# Altium PCB MBR.PcbDoc
Units mm, origin at the board's own origin, x right, y up, seen from the top; angles counter-clockwise.
Board outline 180 x 125 mm, 2 copper layers (Top Layer, Bottom Layer), stack 1.576 mm thick; 66 components, 60 nets, 276 pads, 0 vias.
Unrouted connection lines stored in the file: 180.
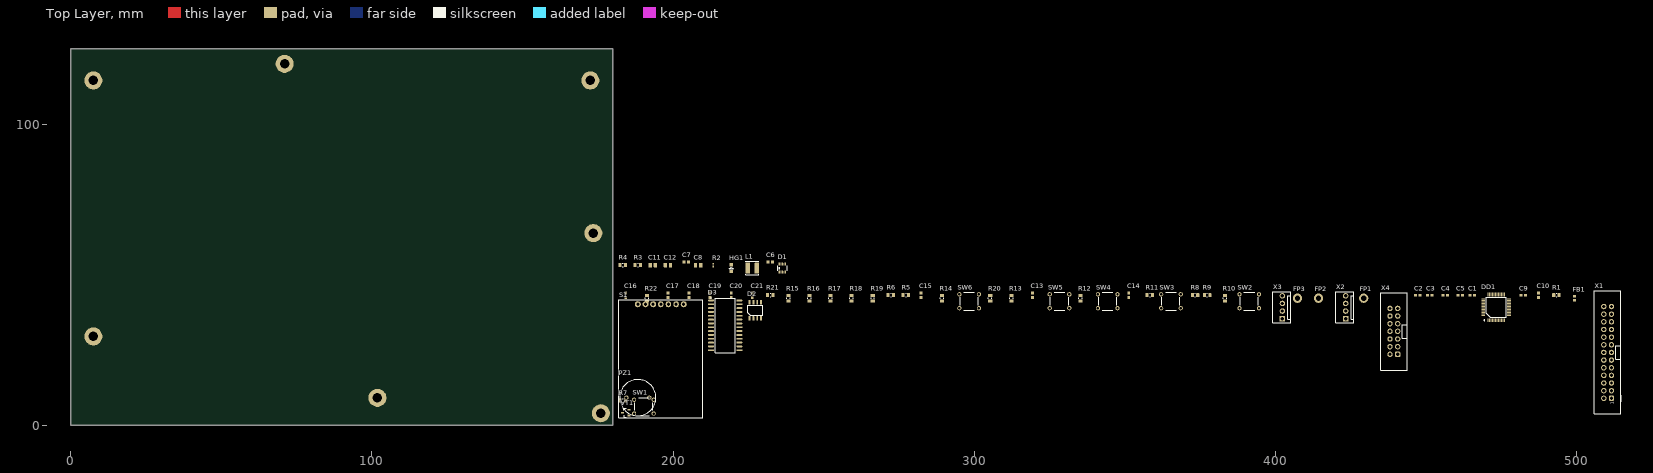
[diagram p0: Top Layer view]
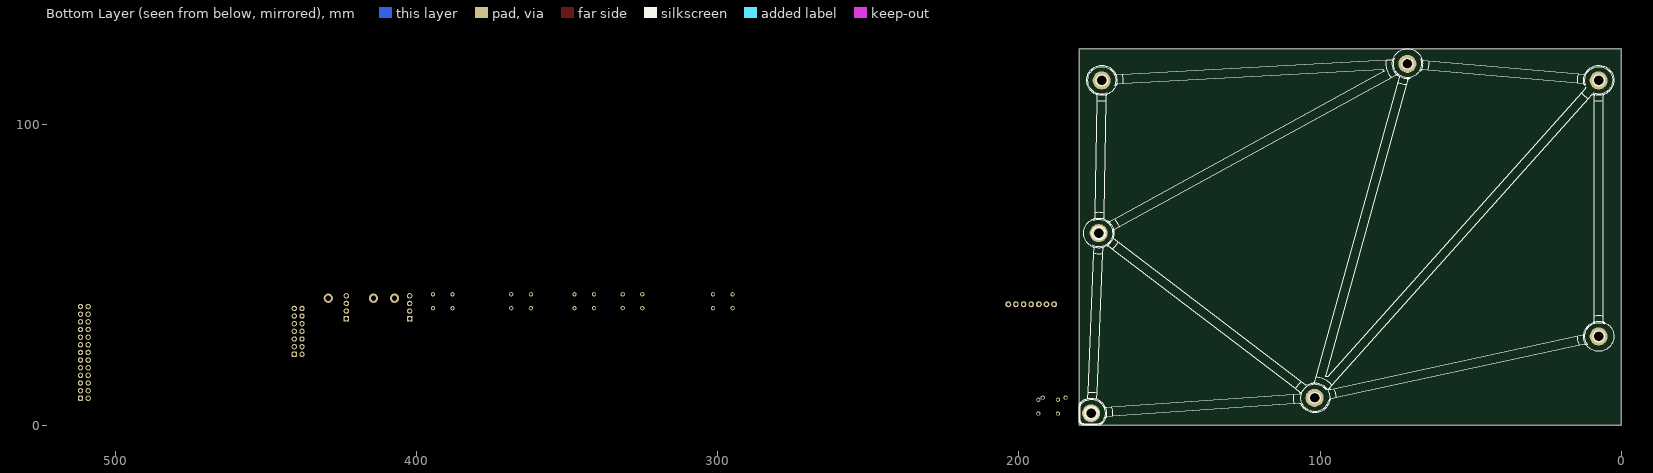
[diagram p1: Bottom Layer view, seen from below]

## Layer stack, top to bottom
Top Solder: solder mask 0.012, Solder Resist, Dk 3.5
Top Layer: signal copper 0.038
Dielectric 1: dielectric 1.5, FR-4, Dk 4.8
Bottom Layer: signal copper 0.038
Bottom Solder: solder mask 0.012, Solder Resist, Dk 3.5

## Board outline
0,0 180,0 180,125 0,125

## Design rules (kind name [scope] priority, off if disabled: settings)
BoardOutlineClearance [All] p1: gap=0.5 ignorepadtopadclearanceinfootprint=FALSE
Clearance MiddleVoltage [InNetClass('MiddleVoltage')] p1: gap=0.5 ignorepadtopadclearanceinfootprint=FALSE except(0: Arc-Hole Track-Hole SMDPad-Hole THPad-Hole Via-Hole Fill-Hole Poly-Hole Region-Hole Text-Hole; 0.2: Arc-Text Track-Text SMDPad-Text THPad-Text Via-Text Fill-Text Poly-Text Region-Text Text-Text)
Clearance HighVoltage [InNetClass('HighVoltage')] p2: gap=1 ignorepadtopadclearanceinfootprint=FALSE except(0: Arc-Hole Track-Hole SMDPad-Hole THPad-Hole Via-Hole Fill-Hole Poly-Hole Region-Hole Text-Hole; 0.2: Arc-Text Track-Text SMDPad-Text THPad-Text Via-Text Fill-Text Poly-Text Region-Text Text-Text)
Clearance Standart [All] p3: gap=0.2 ignorepadtopadclearanceinfootprint=FALSE except(0: Arc-Hole Track-Hole SMDPad-Hole THPad-Hole Via-Hole Fill-Hole Poly-Hole Region-Hole Text-Hole)
ComponentClearance [All] p1: gap=0.1 collisioncheckmode=3 verticalgap=0.1 showdistances=TRUE
Height [All] p1: minheight=0 maxheight=40 prefheight=12.7
HoleSize [All] p1: absolutevalues=TRUE maxlimit=12 minlimit=0.3 maxpercent=80.000 minpercent=20.000
HoleToHoleClearance [All] p1: gap=0.3 allowstackedmicrovias=TRUE
MinimumSolderMaskSliver [All] p1: minsoldermaskwidth=0.1
NetAntennae [All] p1: netantennaetolerance=2
PlaneClearance [All] p1: clearance=0.3
PlaneConnect PlaneConnectMiddleCurrent [InNetClass('MiddleCurrent')] p1: planeconnectstyle=Relief reliefexpansion=0.508 reliefentries=4 reliefconductorwidth=0.5 reliefairgap=0.3
PlaneConnect PlaneHighCurrent [InNetClass('HighCurrent')] p2: planeconnectstyle=Relief reliefexpansion=0.508 reliefentries=4 reliefconductorwidth=0.5 reliefairgap=0.35
PlaneConnect [All] p3: planeconnectstyle=Relief reliefexpansion=0.508 reliefentries=4 reliefconductorwidth=0.3 reliefairgap=0.3
PolygonConnect PolygonConnectMiddleCurrent [All vs InNetClass('MiddleCurrent')] p1: connectstyle=Relief reliefconductorwidth=0.4 reliefentries=4 polygonreliefangle="90 Angle" airgapwidth=0.3
PolygonConnect PolygonHighCurrent [InNetClass('HighCurrent')] p2: connectstyle=Relief reliefconductorwidth=0.5 reliefentries=4 polygonreliefangle="90 Angle" airgapwidth=0.3
PolygonConnect PolygonConnect_Keepout [(ObjectKind = 'Track') And (Layer = 'KeepOutLayer')] p3: connectstyle=Direct reliefconductorwidth=0.254 reliefentries=4 polygonreliefangle="90 Angle" airgapwidth=0.254
PolygonConnect PolygonConnect_Via [IsVia] p4: connectstyle=Direct reliefconductorwidth=0.254 reliefentries=4 polygonreliefangle="90 Angle" airgapwidth=0.254
PolygonConnect [All] p5: thpad.connectstyle=Relief thpad.reliefconductorwidth=0.3 thpad.reliefentries=4 thpad.polygonreliefangle="90 Angle" thpad.airgapwidth=0.25 smdpad.connectstyle=Relief smdpad.reliefconductorwidth=0.3 smdpad.reliefentries=4 smdpad.polygonreliefangle="90 Angle" smdpad.airgapwidth=0.25 via.connectstyle=Direct via.reliefconductorwidth=0.3 via.reliefentries=4 via.polygonreliefangle="90 Angle" via.airgapwidth=0.3
RoutingCorners [All] p1: cornerstyle=45-Degree minsetback=1 maxsetback=3
RoutingVias Power [InNetClass('Power')] p1: holewidth=0.8 width=1.5 viastyle="Through Hole" minholewidth=0.5 minwidth=1 maxholewidth=1.2 maxwidth=3
RoutingVias [All] p2: holewidth=0.4 width=0.8 viastyle="Through Hole" minholewidth=0.3 minwidth=0.6 maxholewidth=0.5 maxwidth=1
SilkToSilkClearance [All] p1: silktosilkclearance=0
SilkToSolderMaskClearance [IsPad] p1: minsilkscreentomaskgap=0.05 clearancetoexposedcopper=TRUE
SolderMaskExpansion SolderMaskExpansion_VIA [IsVia] p1: expansion=-3 istentingtop=TRUE useseparateexpansions=TRUE expansionbottom=-3 istentingbottom=TRUE
SolderMaskExpansion [All] p2: expansion=0.05 istentingtop=FALSE
SupplyNets "Schematic Supply Nets_3" [InNet('+VBAT')] p1: voltage=0.000
SupplyNets "Schematic Supply Nets_2" [InNet('GND')] p2: voltage=0.000
SupplyNets "Schematic Supply Nets_1" [InNet('AVDD')] p3: voltage=0.000
SupplyNets "Schematic Supply Nets" [InNet('3V3')] p4: voltage=0.000
Width Width_ANT [InNetClass('Anthenna')] p1: maxlimit=1.641 minlimit=0.2 preferedwidth=1.641
Width WidthMiddleCurrent [InNetClass('MiddleCurrent')] p2: maxlimit=2 minlimit=0.35 preferedwidth=0.5
Width WidthHighCurrent [InNetClass('HighCurrent')] p3: maxlimit=5 minlimit=0.5 preferedwidth=1
Width [All] p4: maxlimit=0.5 minlimit=0.2 preferedwidth=0.25
19 further rules are at their usual default settings.

## Classes and differential pairs
component class STEP_DOWN: C6 C7 C8 C11 C12 D1 HG1 L1 R2 R3 R4
component class MBR: C1 C2 C3 C4 C5 C9 C10 C13 C14 C15 C16 C17 C18 C19 C20 C21 D2 D3 DD1 FB1 FP1 FP2 FP3 PZ1 R1 R5 R6 R7 R8 R9 R10 R11 R12 R13 R14 R15 R16 R17 R18 R19 R20 R21 R22 S1 SW1 SW2 SW3 SW4 SW5 SW6 VT1 X1 X2 X3 X4

## Components (designator, comment, footprint, x,y, rotation, side; value= is the part's Value field where it differs from the comment)
C1 "0.1uF" C_CERAMIC_0603_MED 465.273,43.181 r0 top
C2 "0.1uF" C_CERAMIC_0603_MED 447.273,43.181 r0 top
C3 "0.1uF" C_CERAMIC_0603_MED 451.273,43.181 r0 top
C4 "0.1uF" C_CERAMIC_0603_MED 456.273,43.181 r0 top
C5 "10uF" C_CERAMIC_0603_MED 461.273,43.181 r0 top
C6 "0.1uF" C_CERAMIC_0603_MED 232.273,54.181 r0 top
C7 "0.1uF" C_CERAMIC_0603_MED 204.273,54.181 r0 top
C8 "22uF" CAP-0805(2012)X125T20 208.273,53.181 r0 top
C9 "0.1uF" C_CERAMIC_0603_MED 482.273,43.181 r0 top
C10 "1uF" C_CERAMIC_0603_MED 487.273,43.181 r90 top
C11 "22uF" CAP-0805(2012)X125T20 193.273,53.181 r0 top
C12 "22uF" CAP-0805(2012)X125T20 198.273,53.181 r0 top
C13 "0.1uF" C_CERAMIC_0603_MED 319.273,43.181 r90 top
C14 "0.1uF" C_CERAMIC_0603_MED 351.273,43.181 r90 top
C15 "0.1uF" C_CERAMIC_0603_MED 282.273,43.181 r90 top
C16 "0.1uF" C_CERAMIC_0603_MED 184.273,43.181 r90 top
C17 "0.1uF" C_CERAMIC_0603_MED 198.273,43.181 r90 top
C18 "0.1uF" C_CERAMIC_0603_MED 205.273,43.181 r90 top
C19 "0.1uF" C_CERAMIC_0603_MED 212.273,43.181 r90 top
C20 "0.1uF" C_CERAMIC_0603_MED 219.273,43.181 r90 top
C21 "0.1uF" C_CERAMIC_0603_MED 226.273,43.181 r90 top
D1 "AP62300WU-7" SOT-23-6 236.273,52.181 r0 top
D2 "24LC128-E/SN" SOIC-8_W3.9MM 227.273,38.181 r0 top
D3 "MCP23017T-E/SO" SOIC-28N_N 217.273,33.181 r0 top
DD1 "STM32F103CBT6" LQFP-48 473.273,39.181 r0 top
FB1 "BLM18KG601BH1D" BLM18KGxxxBH1x_MED 499.273,42.181 r90 top value="600 Ohms @ 100MHz"
FP1 "PAD-1.75mm" PAD-1.75mm 429.273,42.181 r0 top
FP2 "PAD-1.75mm" PAD-1.75mm 414.273,42.181 r0 top
FP3 "PAD-1.75mm" PAD-1.75mm 407.273,42.181 r0 top
HG1 "LTST-C171GKT" LTST-C171GKT 219.273,52.181 r90 top
L1 "4.7uH" SRN4018-Series_1.8mm 226.273,52.181 r0 top
PZ1 "WST-1203UX" WST-1203UX 188.273,9.181 r0 top
R1 "10k" R_ANY_CHIP_0805_MED 493.273,43.181 r0 top
R2 "31.6k" R_ANY_CHIP_0402_MED 213.273,53.181 r90 top
R3 "10k" R_ANY_CHIP_0805_MED 188.273,53.181 r0 top
R4 "510" R_ANY_CHIP_0805_MED 183.273,53.181 r0 top
R5 "10k" R_ANY_CHIP_0805_MED 277.273,43.181 r0 top
R6 "10k" R_ANY_CHIP_0805_MED 272.273,43.181 r0 top
R7 "10k" R_ANY_CHIP_0805_MED 183.273,8.181 r0 top
R8 "10k" R_ANY_CHIP_0805_MED 373.273,43.181 r0 top
R9 "10k" R_ANY_CHIP_0805_MED 377.273,43.181 r0 top
R10 "10k" R_ANY_CHIP_0805_MED 383.273,42.181 r90 top
R11 "10k" R_ANY_CHIP_0805_MED 358.273,43.181 r0 top
R12 "10k" R_ANY_CHIP_0805_MED 335.273,42.181 r90 top
R13 "10k" R_ANY_CHIP_0805_MED 312.273,42.181 r90 top
R14 "10k" R_ANY_CHIP_0805_MED 289.273,42.181 r90 top
R15 "10k" R_ANY_CHIP_0805_MED 238.273,42.181 r90 top
R16 "10k" R_ANY_CHIP_0805_MED 245.273,42.181 r90 top
R17 "10k" R_ANY_CHIP_0805_MED 252.273,42.181 r90 top
R18 "10k" R_ANY_CHIP_0805_MED 259.273,42.181 r90 top
R19 "10k" R_ANY_CHIP_0805_MED 266.273,42.181 r90 top
R20 "220" R_ANY_CHIP_0805_MED 305.273,42.181 r90 top
R21 "220" R_ANY_CHIP_0805_MED 232.273,43.181 r0 top
R22 "10k" R_ANY_CHIP_0805_MED 191.273,42.181 r90 top
S1 "1.3-LCD-Shield" 1.3-TFT-LCD-SHIELD 188.273,40.181 r0 top
SW1 "FSM4JH" 1825910-6 190.273,6.181 r0 top
SW2 "FSM4JH" 1825910-6 391.273,41.181 r0 top
SW3 "FSM4JH" 1825910-6 365.273,41.181 r0 top
SW4 "FSM4JH" 1825910-6 344.273,41.181 r0 top
SW5 "FSM4JH" 1825910-6 328.273,41.181 r0 top
SW6 "FSM4JH" 1825910-6 298.273,41.181 r0 top
VT1 "IRLML6244" SOT-23_MED 184.273,4.181 r0 top
X1 "DS1013-26SSIB1-3A" BH-26 510.273,24.181 r90 top
X2 "WH-04S" WF-4S 423.273,39.181 r90 top
X3 "WH-04S" WF-4S 402.273,39.181 r90 top
X4 "DS1013-14SSIB1-3A" BH-14 439.273,31.181 r90 top

## Footprints (in the part's own frame and the unit in brackets; to place one, negate y for a bottom-side part, rotate by r counter-clockwise, add the part's x,y. Pads: shape width x height; smd on the part's side, far side on the other; paste and mask are expansions set on the pad)
1.3-TFT-LCD-SHIELD [mm]
  round 2 hole 1: 1(0,0) 2(2.54,0) 3(5.08,0) 7(15.24,0)
  oval 1.8x2 hole 1: 4(7.62,0) 5(10.16,0) 6(12.7,0)
  silkscreen extent -6.27,-37.75 21.47,1.47, body extent -6.27,-37.75 21.47,1.47, height 6.2
1825910-6 [mm]
  round 1.4 hole 0.8 mask+0.05: 1(3.25,-2.3) 2(-3.25,-2.3) 3(3.25,2.3) 4(-3.25,2.3)
  silkscreen extent -3,-3 3,3, body extent -3.9,-2.99 3.9,3, height 5
BH-14 [mm]
  rrect50% 1.8x1.8 hole 1.1 mask+0.05: 1(-7.62,-1.27)
  round 1.8 hole 1.1 mask+0.05: 2(-7.62,1.27) 3(-5.08,-1.27) 4(-5.08,1.27) 5(-2.54,-1.27) 6(-2.54,1.27) 7(0,-1.27) 8(0,1.27) 9(2.54,-1.27) 10(2.54,1.27) 11(5.08,-1.27) 12(5.08,1.27) 13(7.62,-1.27) 14(7.62,1.27)
  silkscreen extent -12.84,-4.53 12.74,4.37, body extent -12.79,-4.5 12.79,4.4, height 9
BH-26 [mm]
  rrect50% 1.8x1.8 hole 1.1: 1(-15.24,-1.27)
  round 1.8 hole 1.1: 2(-15.24,1.27) 3(-12.7,-1.27) 4(-12.7,1.27) 5(-10.16,-1.27) 6(-10.16,1.27) 7(-7.62,-1.27) 8(-7.62,1.27) 9(-5.08,-1.27) 10(-5.08,1.27) 11(-2.54,-1.27) 12(-2.54,1.27) 13(0,-1.27) 14(0,1.27) 15(2.54,-1.27) 16(2.54,1.27) 17(5.08,-1.27) 18(5.08,1.27) 19(7.62,-1.27) 20(7.62,1.27) 21(10.16,-1.27) 22(10.16,1.27) 23(12.7,-1.27) 24(12.7,1.27) 25(15.24,-1.27) 26(15.24,1.27)
  silkscreen extent -20.41,-4.5 20.41,4.4, body extent -20.44,-4.5 20.38,4.4, height 9
BLM18KGxxxBH1x_MED [mm] "Chip Inductor, 2-Leads, Body 1,60x0,80mm, IPC Medium Density"
  rrect15% 0.87x0.98 smd mask+0.05: 1(-0.665,0) 2(0.665,0)
  body extent -0.87,-0.47 0.88,0.48, height 0.95
C_CERAMIC_0603_MED [mm] "Chip Capacitor, 2-Leads, Body 1,60x0,80mm, IPC Medium Density"
  rrect15% 1x0.95 smd mask+0.05: 1(-0.75,0) 2(0.75,0)
  Top Layer pour cut-out: -0.05,0.45 0.05,0.45 0.05,-0.45 -0.05,-0.45
  body extent -0.9,-0.5 0.9,0.5, height 0.9
CAP-0805(2012)X125T20 [mm] "Chip Capacitor, 2-Leads, Body 2,00x1,25mm, IPC Medium Density"
  rrect15% 1.15x1.45 smd mask+0.05: 1(-0.85,0) 2(0.85,0)
  Top Layer pour cut-out: -0.05,0.651 0.05,0.651 0.05,-0.649 -0.05,-0.649
  body extent -1.1,-0.72 1.1,0.73, height 1.45
LQFP-48 [mm]
  rrect50% 0.3x1.2 smd mask+0.05: 1(-2.75,-4.25) 2(-2.25,-4.25) 3(-1.75,-4.25) 4(-1.25,-4.25) 5(-0.75,-4.25) 6(-0.25,-4.25) 7(0.25,-4.25) 8(0.75,-4.25) 9(1.25,-4.25) 10(1.75,-4.25) 11(2.25,-4.25) 12(2.75,-4.25) 25(2.75,4.25) 26(2.25,4.25) 27(1.75,4.25) 28(1.25,4.25) 29(0.75,4.25) 30(0.25,4.25) 31(-0.25,4.25) 32(-0.75,4.25) 33(-1.25,4.25) 34(-1.75,4.25) 35(-2.25,4.25) 36(-2.75,4.25)
  rrect50% 1.2x0.3 smd mask+0.05: 13(4.25,-2.75) 14(4.25,-2.25) 15(4.25,-1.75) 16(4.25,-1.25) 17(4.25,-0.75) 18(4.25,-0.25) 19(4.25,0.25) 20(4.25,0.75) 21(4.25,1.25) 22(4.25,1.75) 23(4.25,2.25) 24(4.25,2.75) 37(-4.25,2.75) 38(-4.25,2.25) 39(-4.25,1.75) 40(-4.25,1.25) 41(-4.25,0.75) 42(-4.25,0.25) 43(-4.25,-0.25) 44(-4.25,-0.75) 45(-4.25,-1.25) 46(-4.25,-1.75) 47(-4.25,-2.25) 48(-4.25,-2.75)
  silkscreen extent -4.09,-4.44 3.25,3.25, body extent -4.5,-4.5 4.5,4.5, height 1.6
LTST-C171GKT [mm]
  rrect15% 1.1x1.25 smd mask+0.05: AN(-1.1,0) CA(1.1,0)
  silkscreen extent -0.25,-0.6 0.35,0.6, body extent -1.05,-0.67 1.05,0.68, height 0.9
PAD-1.75mm [mm]
  round 3.1 hole 1.75: 1(0,0)
R_ANY_CHIP_0402_MED [mm] "Chip Resistor, 2-Leads, Body 1,00x0,50mm, IPC Medium Density"
  rrect15% 0.6x0.55 smd mask+0.05: 1(-0.425,0) 2(0.425,0)
  body extent -0.52,-0.27 0.53,0.28, height 0.4
R_ANY_CHIP_0805_MED [mm] "Chip Resistor, 2-Leads, Body 2,00x1,25mm, IPC Medium Density"
  rrect15% 1x1.35 smd: 1(-0.9,0) 2(0.9,0)
  silkscreen extent -0.1,-0.58 0.1,0.58, body extent -1,-0.67 1,0.68, height 0.6
SOIC-8_W3.9MM [mm]
  rrect50% 0.6x1.55 smd mask+0.05: 1(-1.905,-2.7) 2(-0.635,-2.7) 3(0.635,-2.7) 4(1.905,-2.7) 5(1.905,2.7) 6(0.635,2.7) 7(-0.635,2.7) 8(-1.905,2.7)
  silkscreen extent -2.5,-1.6 2.5,1.6, body extent -2.45,-3 2.45,3, height 1.7
SOIC-28N_N [mm]
  oval 2x0.6 smd: 1(-4.7,8.255) 2(-4.7,6.985) 3(-4.7,5.715) 4(-4.7,4.445) 5(-4.7,3.175) 6(-4.7,1.905) 7(-4.7,0.635) 8(-4.7,-0.635) 9(-4.7,-1.905) 10(-4.7,-3.175) 11(-4.7,-4.445) 12(-4.7,-5.715) 13(-4.7,-6.985) 14(-4.7,-8.255) 15(4.7,-8.255) 16(4.7,-6.985) 17(4.7,-5.715) 18(4.7,-4.445) 19(4.7,-3.175) 20(4.7,-1.905) 21(4.7,-0.635) 22(4.7,0.635) 23(4.7,1.905) 24(4.7,3.175) 25(4.7,4.445) 26(4.7,5.715) 27(4.7,6.985) 28(4.7,8.255)
  silkscreen extent -4.82,-9.05 3.3,9.23, body extent -5.15,-8.95 5.15,8.95, height 2.65
SOT-23-6 [mm]
  rrect50% 0.6x1 smd mask+0.05: 1(-0.95,-1.33) 2(0,-1.33) 3(0.95,-1.33) 4(0.95,1.33) 5(0,1.33) 6(-0.95,1.33)
  silkscreen extent -1.59,-0.88 1.59,0.85, body extent -1.52,-1.5 1.52,1.5, height 1.25
SOT-23_MED [mm] "SOT23, 3-Leads, Body 2,92x2,37mm, Pitch 0,95mm, IPC Medium Density"
  rrect15% 0.9x0.6 smd mask+0.05: 1(1.1,-0.95) 2(1.1,0.95) 3(-1.1,0)
  silkscreen extent -0.7,-1.5 0.2,1.5, body extent -1.27,-1.5 1.28,1.5, height 1.15
SRN4018-Series_1.8mm [mm] "Semi-shielded Power Inductors, 4.0x4.0x1.8mm"
  rrect15% 1.5x3.6 smd mask+0.05: 1(-1.55,0) 2(1.55,0)
  silkscreen extent -2.2,-2.2 2.2,2.2, body extent -2.1,-2.1 2.1,2.1, height 1.8
WF-4S [mm] "2.54mm 4-pin connector"
  rect 1.8x1.8 hole 1.1: 1(-3.81,0)
  round 1.8 hole 1.1: 2(-1.27,0) 3(1.27,0) 4(3.81,0)
  silkscreen extent -5.13,-2.7 5.13,3.27, body extent -5.08,-2.7 5.08,3.2, height 11.73
WST-1203UX [mm]
  round 1.4 hole 0.8 mask+0.05: 1(-3.8,0) 2(3.8,0)
  silkscreen extent -6,-6 6,6, body extent -6.01,-6 6,6, height 7.5

## Part data
C1 C2 C3 C4 C6 C7 C9 C13 C14 C15 C16 C17 C18 C19 C20 C21: library part CL10B104KB8NNND, "100nF 50V X7R ±10% 0603 Ceramic Capacitor RoHS", Dielectric Type=X7R, Manufacturer="Samsung Electro-Mechanics", Package=0603, Supplier Part Number 1=CL10B104KB8NNND-ND, Temperature Range="-55°C ~ 125°C", Tolerance=±10%, Voltage=50V, Ajax_1C_ID=21313, Ajax_1C_PN="100nF 50V X7R 10% 0603 CL10B104KB8NNND ceramic capacitor SMD", Ajax_1С_Status=Substitution, Component Status=Released, Component Type=SMD, ComponentLink1Description=Datasheet, ComponentLink1URL=https://media.digikey.com/pdf/Data%20Sheets/Samsung%20PDFs/CL_Series_MLCC_ds.pdf, GUID_1C=f1fd6399-ca68-11ea-ab63-0050569f2651, Part Number=CL10B104KB8NNND, Part Type="Ceramic / X7R / 0603", Price=0,0039378, Replacement=CL10B104KB8NNNC, Standard Lead Time="18 Weeks", Supplier 1=Digi-Key
C5: library part CL10A106KP8NNNC, "10uF 10V X5R ±10% 0603 Ceramic Capacitor RoHS", Dielectric Type=X5R, Manufacturer="Samsung Electro-Mechanics", Package=0603, Supplier Part Number 1=1276-1192-2-ND, Temperature Range="-55°C ~ 85°C", Tolerance=±10%, Voltage=10V, Ajax_1C_ID=20452, Ajax_1C_PN="10uF 10V 10% 0603 CL10A106KP8NNNC Ceramic Capacitor SMD RoHS", Ajax_1С_Status=Substitution, Component Status=Released, Component Type=SMD, ComponentLink1Description=Datasheet, ComponentLink1URL=https://media.digikey.com/pdf/Data%20Sheets/Samsung%20PDFs/CL10A106KP8NNNC_Spec.pdf, GUID_1C=10ec15c4-96a3-11ea-ab61-0050569f2651, Part Number=CL10A106KP8NNNC, Part Type="Ceramic / X5R / 0603", Price=0,0106, Replacement=NONE, Standard Lead Time="22 Weeks", Supplier 1=Digi-Key
C8 C11 C12: library part C2012JB1V226M125AC, "22uF 35V JB ±20% 0805 Ceramic Capacitor RoHS", Dielectric Type=JB, Manufacturer="TDK Corporation", Package=0805, Supplier Part Number 1=810-C2012JB1V226M12C, Temperature Range="-25°C ~ 85°C", Tolerance=±20%, Voltage=35V, Ajax_1C_ID=32073, Ajax_1C_PN="22uF 35V 20% 0805 TDK C2012JB1V226M125AC Ceramic Capacitors RoHS", Ajax_1С_Status="RND Only", Component Status=Released, Component Type=SMD, ComponentLink1Description=Datasheet, ComponentLink1URL=https://product.tdk.com/info/en/catalog/datasheets/mlcc_commercial_general_en.pdf, GUID_1C=562d6396-e930-11eb-ab74-0050569f2651, Part Number=C2012JB1V226M125AC, Part Type="Ceramic / JB / 0805", Price=0,567, Replacement=NONE, Standard Lead Time="30 Weeks", Supplier 1=Mouser
C10: library part CL10B105KO8NNNC, "1uF 16V X7R ±10% 0603 Ceramic Capacitor RoHS", Dielectric Type=X7R, Manufacturer="Samsung Electro-Mechanics", Package=0603, Supplier Part Number 1=1276-1019-2-ND, Temperature Range="-55°C ~ 125°C", Tolerance=±10%, Voltage=16V, Ajax_1C_ID=7734, Ajax_1C_PN="1uF 16V X7R 10% 0603 CL10B105KO8NNNC Ceramic Capacitor SMD RoHS", Ajax_1С_Status="Mass Production", Component Status=Released, Component Type=SMD, ComponentLink1Description=Datasheet, ComponentLink1URL=https://media.digikey.com/pdf/Data%20Sheets/Samsung%20PDFs/CL_Series_MLCC_ds.pdf, GUID_1C=0e0d4f9c-d19c-11e5-8143-d8cb8a9acc66, Part Number=CL10B105KO8NNNC, Part Type="Ceramic / X7R / 0603", Price=0,00367919, Replacement=NONE, Standard Lead Time="18 Weeks", Supplier 1=Digi-Key
D1: "4.35V to 18V, 2A, High Efficiency Synchronous Step Down Converter, 500kHz, SOT-23-6", Manufacturer="Diodes Incorporated", Package=SOT-23-6, Temperature Range="-40°C ~ 85°C", Ajax_1С_Status="RND Only", Component Status=Released, Component Type=SMD, ComponentLink1Description=Datasheet, Part Number=AP62300WU-7, Part Type="Power / DC-DC / Buck", Replacement=NONE
D2: "EEPROM Memory IC 128Kb (16K x 8), I2C, 400kHz, 900ns, SOIC-8", Manufacturer="Microchip Technology", Package=SOIC-8, Supplier Part Number 1=579-24LC128-E/SN, Temperature Range="-40°C ~ 125°C", Ajax_1C_ID=10590, Ajax_1C_PN="24LC128-E/SN SO8", Ajax_1С_Status="RND Only", Component Status="On Review", Component Type=SMD, ComponentLink1Description=Datasheet, ComponentLink1URL=http://www.microchip.com/mymicrochip/filehandler.aspx?ddocname=en011851, GUID_1C=19c1e12f-7c36-11e7-813c-14dda9d2d04d, Part Number=24LC128-E/SN, Part Type="Memory / EEPROM", Price=0,83, Replacement=NONE, Standard Lead Time="6 Weeks", Supplier 1=Mouser
D3: "I/O Expander 16 I2C 1.7MHz, SOIC-28", Manufacturer="Microchip Technology", Package=SOIC-28, Supplier Part Number 1=MCP23017T-E/SOTR-ND, Temperature Range="-40°C ~ 125°C", Ajax_1C_ID=14445, Ajax_1C_PN="MCP23017T-E/SO Microchip I/O Expander I2C 28-SOIC", Ajax_1С_Status="RND Only", Component Status="On Review", Component Type=SMD, ComponentLink1Description=Datasheet, ComponentLink1URL=https://ww1.microchip.com/downloads/en/DeviceDoc/20001952C.pdf, GUID_1C=76bcf1a9-fe09-11e8-ab4d-0050569f2651, Part Number=MCP23017T-E/SO, Part Type="Interface / IO Expander", Price=1,2402, Replacement=NONE, Standard Lead Time="12 Weeks", Supplier 1=Digi-Key
DD1: "ARM Cortex-M3 MCU with 128 kB Flash, 72 MHz CPU, USB and CAN, LQFP-48", Manufacturer=STMicroelectronics, Package=LQFP-48, Supplier Part Number 1=511-STM32F103CBT6, Temperature Range="-40°C ~ 85°C", Ajax_1C_ID=53694, Ajax_1C_PN="STM32F103CBT6 IC MCU 32BIT 128KB FLASH 48LQFP ST", Ajax_1С_Status="RND Only", Component Status=Released, Component Type=SMD, ComponentLink1Description=Datasheet, ComponentLink1URL=https://eu.mouser.com/datasheet/2/389/stm32f103c8-1851025.pdf, GUID_1C=e1b5048f-59bb-11ed-a364-005056994834, Part Number=STM32F103CBT6, Part Type="MCU / ARM Cortex-M3", Price=2,873125, Replacement=NONE, Standard Lead Time="52 Weeks", Supplier 1=Mouser
FB1: "600 Ohms @ 100MHz Power Line Ferrite Bead 0603, 500mA 150mOhm", Current=0.5A, Manufacturer="Murata Electronics", Package=0603, Saturation Current=NONE, Supplier Part Number 1=490-14032-2-ND, Temperature Range="-55°C ~ 150°C", Tolerance=±25%, Ajax_1C_ID=20206, Ajax_1C_PN="600R 500mA 0603 BLM18KG601BH1D Murata ferrite bead", Ajax_1С_Status="Mass Production", Component Status=Released, Component Type=SMD, ComponentLink1Description=Datasheet, ComponentLink1URL=https://www.murata.com/en-us/products/productdata/8798137286686/QNFA9129.pdf, GUID_1C=cce02533-8605-11ea-ab60-0050569f2651, Part Number=BLM18KG601BH1D, Part Type="Ferrite Bead", Price=0.01096, Replacement=NONE, Standard Lead Time="7 Weeks", Supplier 1=Digi-Key
FP1 FP2 FP3: "1.75mm Pad for Plug-In or Receptacle", Manufacturer=NONE, Ajax_1C_PN=NONE, Ajax_1С_Status="RND Only", Component Status=Released, Component Type=PTH, ComponentLink1Description=Datasheet, ComponentLink1URL=NONE, Part Number=PAD-1.75mm, Part Type=Pad, Price=NONE, Replacement=NONE, Temperature Range=NONE
HG1: "Low Power LED, Green 565nm, Clear, SMD 0805, Vf 2.1V - 2.6V, 5 ~ 12mcd @ 20 mA, 130°", Color=Green, Manufacturer="Lite-On Optoelectronics", Package=0805, Supplier Part Number 1=160-1423-2-ND, Temperature Range="-55°C ~ 85°C", Ajax_1C_ID=30364, Ajax_1C_PN="LTST-C171GKT Green SMD LED 0805 12mcd 20mA 130deg RoHS", Ajax_1С_Status="RND Only", Component Status=Released, Component Type=SMD, ComponentLink1Description=Datasheet, ComponentLink1URL=https://media.digikey.com/pdf/Data%20Sheets/Lite-On%20PDFs/LTST-C171GKT.pdf, GUID_1C=df39881f-c399-11eb-ab74-0050569f2651, Part Number=LTST-C171GKT, Part Type="LED / 0805", Price=0,0319, Replacement=NONE, Supplier 1=Digi-Key, Wavelength=565nm
L1: library part SRN4018-4R7M, "4.7uH Semi-Shielded Wirewound Inductor 1.9A 84mOhm Max", Current=1.9A, Manufacturer="Bourns Inc", Package=4.0x4.0x1.8mm, Saturation Current=2A, Supplier Part Number 1=652-SRN4018-4R7M, Temperature Range="-25°C ~ 120°C", Tolerance=±20%, Ajax_1C_ID=20972, Ajax_1C_PN="4.7uH SRN4018-4R7M SMD Индуктивность", Ajax_1С_Status="RND Only", Component Status=Released, Component Type=SMD, ComponentLink1Description=Datasheet, ComponentLink1URL=https://eu.mouser.com/datasheet/2/54/srn4018-1391320.pdf, GUID_1C=7ba8f5fd-b629-11ea-ab61-0050569f2651, Part Number=SRN4018-4R7M, Part Type="Power / Ferrite Core", Price=0,291, Replacement=NONE, Standard Lead Time="42 Weeks", Supplier 1=Mouser
PZ1: "Buzzer, Internally Driven Magnetic 3V 30mA 2.3kHz 82dB @ 3V, 10cm, PTH", Manufacturer=Soberton, Supplier Part Number 1=433-1047-ND, Temperature Range="-20°C ~ 60°C", Ajax_1C_ID=67190, Ajax_1C_PN="WST-1203UX BUZZER MAGNETIC 3V 12MM TH Soberton Inc.", Ajax_1С_Status="RND Only", Component Status=Released, Component Type=PTH, ComponentLink1Description=Datasheet, ComponentLink1URL=https://www.soberton.com/wp-content/uploads/2019/02/WST-1203UX.-17-Feb-2019-pdf.pdf, GUID_1C=b4e25317-da9e-11ed-a91d-00505699469b, Part Number=WST-1203UX, Part Type=Buzzer, Price=1,214, Replacement=NONE, Supplier 1=Digi-Key
R1 R3 R5 R6 R7 R8 R9 R10 R11 R12 R13 R14 R15 R16 R17 R18 R19 R22: library part RC0805FR-0710K2L, "10 kOhms ±1%, 1/8W 0805 Thick Film Resistor", Manufacturer=Yageo, Package=0805, Power Rating=0.125W, Supplier Part Number 1=311-10.2KCRTR-ND, Temperature Range="-55°C ~ 155°C", Temperature Stability=±100ppm/°C, Tolerance=±1%, Voltage=150V, Ajax_1C_ID=13943, Ajax_1C_PN="10.2k 1% 0805 Resistors SMD RoHS", Ajax_1С_Status="Mass Production", Component Status=Released, Component Type=SMD, ComponentLink1Description=Datasheet, ComponentLink1URL=https://eu.mouser.com/datasheet/2/447/PYu_RC_Group_51_RoHS_L_10-1664068.pdf, GUID_1C=8bc9d0ce-c58a-11e8-ab47-0050569f2651, Part Number=RC0805FR-0710K2L, Part Type="Thick Film", Price=0,0014, Replacement=NONE, Supplier 1=Digi-Key
R2: library part RC0402FR-0731K6L, "31.6 kOhms ±1% 1/16W 0402 Thick Film Resistor", Manufacturer=Yageo, Package=0402, Power Rating=0.062W, Supplier Part Number 1=603-RC0402FR-0731K6L, Temperature Range="-55°C ~ 155°C", Temperature Stability=±100ppm/°C, Tolerance=±1%, Voltage=50V, Ajax_1C_ID=42440, Ajax_1C_PN="31.6k 1% 0402 Resistors SMD RoHS", Ajax_1С_Status="RND Only", Component Status=Released, Component Type=SMD, ComponentLink1Description=Datasheet, ComponentLink1URL=https://eu.mouser.com/datasheet/2/447/PYu_RC_Group_51_RoHS_L_11-1984063.pdf, GUID_1C=e9ef95d9-cab3-11ec-a360-005056994834, Part Number=RC0402FR-0731K6L, Part Type="Thick Film", Price=0,013, Replacement=NONE, Supplier 1=Mouser
R4: library part ERJ-P06F5100V, "510 Ohms ±1%, 1/2W 0805 High Power Thick Film Resistor", Manufacturer=Panasonic, Package=0805, Power Rating=0.5W, Supplier Part Number 1=667-ERJ-P06F5100V, Temperature Range="-55°C ~ 155°C", Temperature Stability=±100ppm/°C, Tolerance=±1%, Voltage=400V, Ajax_1C_ID=15765, Ajax_1C_PN="510R 1% 0.5W 0805 Panasonic ERJ-P06F5100V Resistors SMD RoHS", Ajax_1С_Status="RND Only", Component Status=Released, Component Type=SMD, ComponentLink1Description=Datasheet, ComponentLink1URL=https://eu.mouser.com/datasheet/2/315/AOA0000C331-1141874.pdf, GUID_1C=3592f296-62b5-11e9-ab4f-0050569f2651, Part Number=ERJ-P06F5100V, Part Type="Thick Film / Anti-Surge/Pulse Withstanding", Price=0,036096, Replacement=NONE, Supplier 1=Mouser
R20 R21: library part RC0805JR-07220RL, "220 Ohms ±5%, 1/8W 0805 Thick Film Resistor", Manufacturer=Yageo, Package=0805, Power Rating=0.125W, Temperature Range="-55°C ~ 155°C", Temperature Stability=±100ppm/°C, Tolerance=±5%, Voltage=150V, Ajax_1C_ID=7127, Ajax_1C_PN="220R 5% 0805 Resistors SMD RoHS", Ajax_1С_Status="RND Only", Component Status=Released, Component Type=SMD, ComponentLink1Description=Datasheet, ComponentLink1URL=https://eu.mouser.com/datasheet/2/447/PYu_RC_Group_51_RoHS_L_10-1664068.pdf, GUID_1C=9c0a86ee-7805-11e5-9653-a45d36c4a9e5, Part Number=RC0805JR-07220RL, Part Type="Thick Film", Price=0,0017, Replacement=NONE
S1: library part 1.3-TFT-LCD-SHIELD, "1.3 Inch SPI TFT LCD Module, ST7789 Controller", Manufacturer=Undefined, Temperature Range=NONE, Ajax_1C_ID=17121, Ajax_1C_PN="1.3\" 240х240 IPS TFT LCD цветной дисплей контроллер ST7789", Ajax_1С_Status="RND Only", Component Status=Released, Component Type=PTH, ComponentLink1Description=Datasheet, ComponentLink1URL=NONE, GUID_1C=4f8eff20-d085-11e9-ab57-0050569f2651, Part Number=1.3-TFT-LCD-SHIELD, Part Type="LCD Shield", Price=6,89115799, Replacement=NONE
SW1 SW2 SW3 SW4 SW5 SW6: library part 1825910-6, "Tactile Switch, SPST-NO, Top Actuated, PTH", Manufacturer="TE Connectivity", Supplier Part Number 1=450-1650-ND, Temperature Range="-35°C ~ 85°C", Ajax_1C_PN=NONE, Ajax_1С_Status="RND Only", Component Status="On Review", Component Type=PTH, ComponentLink1Description=Datasheet, ComponentLink1URL=https://www.te.com/commerce/DocumentDelivery/DDEController?Action=srchrtrv&DocNm=1825910&DocType=Customer+Drawing&DocLang=English, Part Number=1825910-6, Part Type="Switch / Tactile", Price=NONE, Replacement=NONE, Supplier 1=Digi-Key
VT1: library part IRLML6244TRPBF, "20V, 6.3A max N-Channel HEXFET MOSFET, 21mOhm @ Vgs = 4.5V", Manufacturer="Infineon Technologies", Package=SOT-23, Supplier Part Number 1=IRLML6244TRPBFTR-ND, Temperature Range="-55°C ~ 150°C", Ajax_1C_ID=5903, Ajax_1C_PN="IRLML6244TRPBF. полевой транзистор", Ajax_1С_Status="Mass Production", Component Status=Released, Component Type=SMD, ComponentLink1Description=Datasheet, ComponentLink1URL=https://www.infineon.com/dgdl/irlml6244pbf.pdf?fileId=5546d462533600a4015356686fed261f, GUID_1C=6032e646-a6d2-11e4-9c1d-a45d36c4a9e5, Id=6.3A, Part Number=IRLML6244TRPBF, Part Type=N-Channel, Price=0,05, Rds=27mOhm, Replacement=NONE, Standard Lead Time="15 Weeks", Supplier 1=Digi-Key, Vds=20V
X1: "2.54mm Vertical Box Header, Two Rows, 26 Pin, 20mOhm max, Male IDC BH-26", Manufacturer=Connfly, Temperature Range="-40°C ~ 105°C", Ajax_1C_ID=14527, Ajax_1C_PN="BH-26 : Вилка в плату IDC : IDC-26", Ajax_1С_Status="RND Only", Component Status=Released, Component Type=PTH, ComponentLink1Description=Datasheet, ComponentLink1URL=\\altiumdb.ajax.local\files\Datasheet\Connectors\DS1013.pdf, GUID_1C=b61e51fd-0757-11e9-ab4d-0050569f2651, Part Number=DS1013-26SSIB1-3A, Part Type="IDC (Box Header) / Vertical", Price=0,1, Replacement=NONE
X2 X3: library part CI3104P1V00, "WH Series 2.54mm Wire to Board Straight DIP Type Headers, 4 Pin", Manufacturer=CviLux, Temperature Range="-25℃ ~ 85℃", Ajax_1C_ID=1232, Ajax_1C_PN="WF-04S, разъем 4 пина \"папа\", на плату", Ajax_1С_Status="RND Only", Component Status=Released, Component Type=PTH, ComponentLink1Description=Datasheet, ComponentLink1URL=\\altiumdb.ajax.local\files\Datasheet\Connectors\CI3102S.pdf, GUID_1C=2c368b74-dd41-11e0-af93-6c626deda1bb, Part Number=CI3104P1V00, Part Type="Wire-to-Board / Header", Price=0,01936, Replacement=NONE
X4: "2.54mm Streight Box Header, Two Rows, 14 Pin, 20mOhm max, Male IDC BH-14", Manufacturer=Connfly, Temperature Range="-40°C ~ 105°C", Ajax_1C_ID=28120, Ajax_1C_PN="BH-14 Вилка в плату IDC", Ajax_1С_Status="RND Only", Component Status=Released, Component Type=PTH, ComponentLink1Description=Datasheet, ComponentLink1URL=\\altiumdb.ajax.local\files\Datasheet\Connectors\DS1013.pdf, GUID_1C=134bd8be-8d66-11eb-ab70-0050569f2651, Part Number=DS1013-14SSIB1-3A, Part Type="IDC (Box Header) / Vertical", Price=0,06, Replacement=NONE

## Free pads (board coordinates)
  round 6 hole 3.2: 0(7.5,29.5) 0(7.5,114.5) 0(71,120) 0(101.8,9.1) 0(172.5,114.5) 0(173.5,63.8) 0(176,4)

## Nets (pads, with @x,y where several pads share a name; then routed paths per layer and width w, separated by ;. In a path a pad name is that pad's centre, name@x,y a point inside that pad or via, vN(x,y) a via of type N, cw(c..) or ccw(c..) an arc to the next point about the centre after c; other vN are vias at no path point)
3V3: C2.2 C3.2 C4.2 C5.2 C11.1 C12.1 C13.2 C14.1 C16.2 D2.8 D3.9 DD1.24 DD1.36 DD1.48 FB1.2 HG1.AN L1.2 R1.1 R2.2 R5.2 R7.1 R8.2 R9.2 R10.1 R11.1 R12.1 R13.1 R14.1 R20.2 S1.2 X3.1
+VBAT: C7.2 C8.1 D1.3 D1.5 FP1.1 X2.1
AVDD: C9.2 C10.1 DD1.9 FB1.1
BTN_BK: C20.1 DD1.16 R18.1
BTN_DW: C17.1 DD1.14 R15.1
BTN_OK: C19.1 DD1.15 R17.1
BTN_UP: C18.1 DD1.32 R16.1
BTN_XX: C21.1 DD1.17 R19.1
cCONNECT_CHARGER: D3.24 X1.23
cEN_12V: D3.7 D3.26 X1.24
cEN_220V_OUT: D3.5 X1.4
cEN_BRIDGE_POWER: D3.21 X1.22
cEN_BUZZER: DD1.29 R21.1
cEN_BYPASS: D3.4 X1.1
cEN_CHARGER_PWR: DD1.18 X4.5
cEN_FAN: D3.27 X1.26
cEN_UART_EG: D3.3 D3.23 X1.19
cPOWER_EN: D3.6 X1.12
cPOWER_STROB: D3.25 X1.11
dEXT_U_DET: DD1.30 X1.2
dPOWER_STATE: DD1.31 X1.6
DT0: D3.1 X1.14
DT1: D3.2 X1.13
EG_RX: DD1.21 X1.17
EG_TX: DD1.22 X1.18
FQSEL: D3.8 X1.8
GND: C1.2 C2.1 C3.1 C4.1 C5.1 C7.1 C8.2 C9.1 C10.2 C11.2 C12.2 C13.1 C14.2 C15.2 C16.1 C17.2 C18.2 C19.2 C20.2 C21.2 D1.1 D2.1 D2.2 D2.3 D2.4 D2.7 D3.10 D3.15 D3.16 D3.17 DD1.8 DD1.23 DD1.35 DD1.47 R3.2 R4.2 R6.2 R22.1 S1.1 SW1.1 SW1.2 SW2.1 SW2.2 SW3.1 SW3.2 SW4.1 SW4.2 SW5.1 SW5.2 SW6.1 SW6.2 VT1.2 X1.7 X1.9 X1.10 X1.15 X1.16 X1.25 X2.2 X3.4 X4.2 X4.4 X4.6 X4.8 X4.10 X4.12 X4.14
LCD_BL: DD1.26 R6.1 S1.7
LCD_DC: DD1.25 S1.6
LCD_MOSI: DD1.40 S1.4
LCD_RST: DD1.41 R5.1 S1.5
LCD_SCL: DD1.39 S1.3
NetC1_1: C1.1 DD1.7 R1.2 SW1.3 SW1.4
NetC6_1: C6.1 D1.2 L1.1
NetC6_2: C6.2 D1.6
NetC15_1: C15.1 D3.18 R7.2
NetD1_4: D1.4 R2.1 R3.1
NetFP2_1: FP2.1 X2.3
NetFP3_1: FP3.1 X2.4
NetHG1_CA: HG1.CA R4.1
NetPZ1_1: PZ1.1 R20.1
NetPZ1_2: PZ1.2 VT1.3
NetR10_2: R10.2 R19.2 SW2.3 SW2.4
NetR11_2: R11.2 R18.2 SW3.3 SW3.4
NetR12_2: R12.2 R17.2 SW4.3 SW4.4
NetR13_2: R13.2 R16.2 SW5.3 SW5.4
NetR14_2: R14.2 R15.2 SW6.3 SW6.4
NetR21_2: R21.2 R22.2 VT1.1
SCL: D2.6 D3.12 DD1.42 R8.1 X4.1
SDA: D2.5 D3.13 DD1.43 R9.1 X4.3
SET_I_CHRG: DD1.45 X4.7
SET_U_CHRG: DD1.46 X4.9
SST: D3.28 X1.5
SWDCLK: DD1.37 X3.3
SWDIO: DD1.34 X3.2
xI_CHRG: DD1.12 X4.11
xMEAS_CURRENT: DD1.10 X1.20
xMEAS_VBAT: DD1.11 X1.21
xU_CHRG: DD1.13 X4.13
сEN_PWM: D3.22 X1.3
pads on no net: D3.11 D3.14 D3.19 D3.20 DD1.1 DD1.2 DD1.3 DD1.4 DD1.5 DD1.6 DD1.19 DD1.20 DD1.27 DD1.28 DD1.33 DD1.38 DD1.44

## Other copper
Multi-Layer:
  pour cut-out: 97.8,9.1 ccw(c101.8,9.1) 101.8,5.1 ccw(c101.8,9.1) 105.8,9.1 ccw(c101.8,9.1) 101.8,13.1 ccw(c101.8,9.1)
  pour cut-out: 67,120 ccw(c71,120) 71,116 ccw(c71,120) 75,120 ccw(c71,120) 71,124 ccw(c71,120)
  pour cut-out: 3.5,29.5 ccw(c7.5,29.5) 7.5,25.5 ccw(c7.5,29.5) 11.5,29.5 ccw(c7.5,29.5) 7.5,33.5 ccw(c7.5,29.5)
  pour cut-out: 3.5,114.5 ccw(c7.5,114.5) 7.5,110.5 ccw(c7.5,114.5) 11.5,114.5 ccw(c7.5,114.5) 7.5,118.5 ccw(c7.5,114.5)
  pour cut-out: 168.5,114.5 ccw(c172.5,114.5) 172.5,110.5 ccw(c172.5,114.5) 176.5,114.5 ccw(c172.5,114.5) 172.5,118.5 ccw(c172.5,114.5)
  pour cut-out: 169.5,63.8 ccw(c173.5,63.8) 173.5,59.8 ccw(c173.5,63.8) 177.5,63.8 ccw(c173.5,63.8) 173.5,67.8 ccw(c173.5,63.8)
  pour cut-out: 172,4 ccw(c176,4) 176,0 ccw(c176,4) 180,4 ccw(c176,4) 176,8 ccw(c176,4)

## Silkscreen, mask and mechanical layers (free items; w line width, h text height)
Bottom Overlay:
  drawing of 363 lines, arcs and shapes, not listed
Top Solder:
  text "'.Product_Name'.'.Project_ID'.v'.Project_Version'" at 111.338,119 h2
Bottom Solder:
  text "'.Product_Name'.'.Project_ID'.v'.Project_Version'" at 138.662,119 h2
Board:
  the board outline again, w0.2
Top Assembly:
  text "PCB TOP VIEW" at 80.145,129 h2
Bottom Assembly:
  text "PCB BOTTOM VIEW" at 102.683,129 h2
Title:
  lines w0.1: 198.8,199.4 266.75,199.4
  lines w0.127: -44.879,10.002 -39.799,10.002 ; -44.879,80.487 -39.799,80.487 ; -44.879,150.972 -39.799,150.972 ; 4.397,-60.483 4.397,-55.403 ; 4.397,216.377 4.397,221.457 ; 53.546,-60.483 53.546,-55.403 ; 53.546,216.377 53.546,221.457 ; 102.695,-60.483 102.695,-55.403 ; 102.695,216.377 102.695,221.457 ; 151.971,-60.483 151.971,-55.403 ; 151.971,216.377 151.971,221.457 ; 194.725,-55.375 194.725,-25.375 343.725,-25.375 ; 194.725,-50.375 343.725,-50.375 ; 194.725,-45.375 343.725,-45.375 ; 194.725,-35.375 343.725,-35.375 ; 201.12,-60.483 201.12,-55.403 ; 201.12,216.377 201.12,221.457 ; 209.725,-45.375 209.725,-35.375 ; 250.269,-60.483 250.269,-55.403 ; 250.269,216.377 250.269,221.457 ; 279.725,-55.375 279.725,-45.375 ; 299.545,-60.483 299.545,-55.403 ; 299.545,216.377 299.545,221.457 ; 328.725,-45.375 328.725,-35.375 ; 343.741,10.002 348.821,10.002 ; 343.741,80.487 348.821,80.487 ; 343.741,150.972 348.821,150.972 ; -44.879,-60.483 348.821,-60.483 348.821,221.457 -44.879,221.457 -44.879,-60.483 ; -39.799,-55.403 343.741,-55.403 343.741,216.377 -39.799,216.377 -39.799,-55.403
  text "1" at -20.842,218.028 h1.78
  text "2" at 28.197,218.028 h1.78
  text "3" at 77.456,218.028 h1.78
  text "4" at 126.749,218.028 h1.78
  text "5" at 176.025,218.028 h1.78
  text "6" at 225.047,218.028 h1.78
  text "7" at 274.577,218.028 h1.78
  text "8" at 323.599,218.028 h1.78
  text "NOTES: UNLESS OTHERWISE SPECIFIED." at 200.2,200.45 h2.5
  text "1. MATERIAL:BASE MATERIAL LAMINATED EPOXY GLASS (ANY COLOR)" at 200.35,194.4 h2.5
  text "GRADE NEMA FR-4. ALL SIDES 1 OZ COPPER PER MIL-P-13949." at 206.95,189.9 h2.5
  text "AND IS UL APPROVED MFR SOURCE WITH 1.6 mm +-10 PERCENT" at 206.95,186.2 h2.5
  text "A" at -42.974,184.043 h1.78
  text "A" at 345.646,184.043 h1.78
  text "2. SOLDER PLATE PER QQ-S-571." at 200.35,181.9 h2.5
  text "3. SILKSCREEN IS ABSENT." at 200.35,177.9 h2.5
  text "4. DIMENSIONS IN MILLIMETERS, (...) - FOR REFERENCE," at 200.3,173 h2.5
  text "TOLERANCE ARE: +-0.15; HOLES: +- 0.05." at 207.45,168.95 h2.5
  text "5. LIQUID PHOTO IMAGABLE SOLDERMASK ENTHRONE DSR3241" at 200.35,164.9 h2.5
  text "OR ALTERNATIVE." at 207.45,160.95 h2.5
  text "6.  FOR REF ONLY: THIS BOARD HAS SMD ON BOTH SIDES." at 200.35,156.9 h2.5
  text "7.  THE FINISH OF THE BOARD IS HASL." at 200.2,150.5 h2.5
  text "8. PCB stackup:" at 200.2,144.8 h2.5
  text "B" at -42.974,113.431 h1.78
  text "B" at 345.646,113.431 h1.78
  text "C" at -42.974,42.819 h1.78
  text "C" at 345.646,42.819 h1.78
  text "D" at -42.974,-27.285 h1.78
  text "D" at 345.646,-27.285 h1.78
  text "TITLE:" at 195.7,-27.8 h1.2
  text "SIZE:" at 195.7,-37.55 h1.2
  text "DWG NO:" at 210.7,-37.55 h1.2
  text "REV:" at 330.2,-37.55 h1.2
  text ".Project_Version" at 335.4,-38.7 h2.5
  text "A3" at 201.7,-42.3 h2.5
  text "DATE:" at 195.7,-47.55 h1.2
  text "PCB DESIGNER:" at 281.2,-47.55 h1.2
  text ".PRINT_DATE" at 209.2,-48.8 h2.5
  text "FILE NAME:" at 195.7,-52.55 h1.2
  text "SHEET:" at 280.95,-52.55 h1.2
  text ".PCB_FILE_NAME_NO_PATH" at 209.2,-53.8 h2.5
  text "1 OF 1" at 298.95,-54.05 h2.5
  text "1" at -20.842,-58.832 h1.78
  text "2" at 28.197,-58.832 h1.78
  text "3" at 77.456,-58.832 h1.78
  text "4" at 126.749,-58.832 h1.78
  text "5" at 176.025,-58.832 h1.78
  text "6" at 225.047,-58.832 h1.78
  text "7" at 274.577,-58.832 h1.78
  text "8" at 323.599,-58.832 h1.78
Dimensions:
  text "DIMENSIONS" at 82.421,129 h2

## Dimensions
0,0 to 180,0 on Dimensions
0,0 to 0,125 on Dimensions

## Text inside footprints (layer, text, board x,y; h text height)
HG1: Top Assembly "2" at 219.398,51.281 h0.3 r90; Top Assembly "1" at 219.398,52.931 h0.3 r90
X1: Top Overlay "1" at 512.348,7.056 h1.02 r90; Top Assembly "26" at 509.498,40.831 h1 r90; Top Assembly "1" at 512.348,6.931 h1 r90
X4: Top Assembly "1" at 441.611,21.215 h0.94 r90; Top Assembly "13" at 441.611,39.796 h0.94 r90; Top Assembly "2" at 439.071,21.215 h0.94 r90; Top Assembly "14" at 439.071,39.796 h0.94 r90